# EAGLE board 3.7LiPoly Management 2.0 (EAGLE 9.2.2)
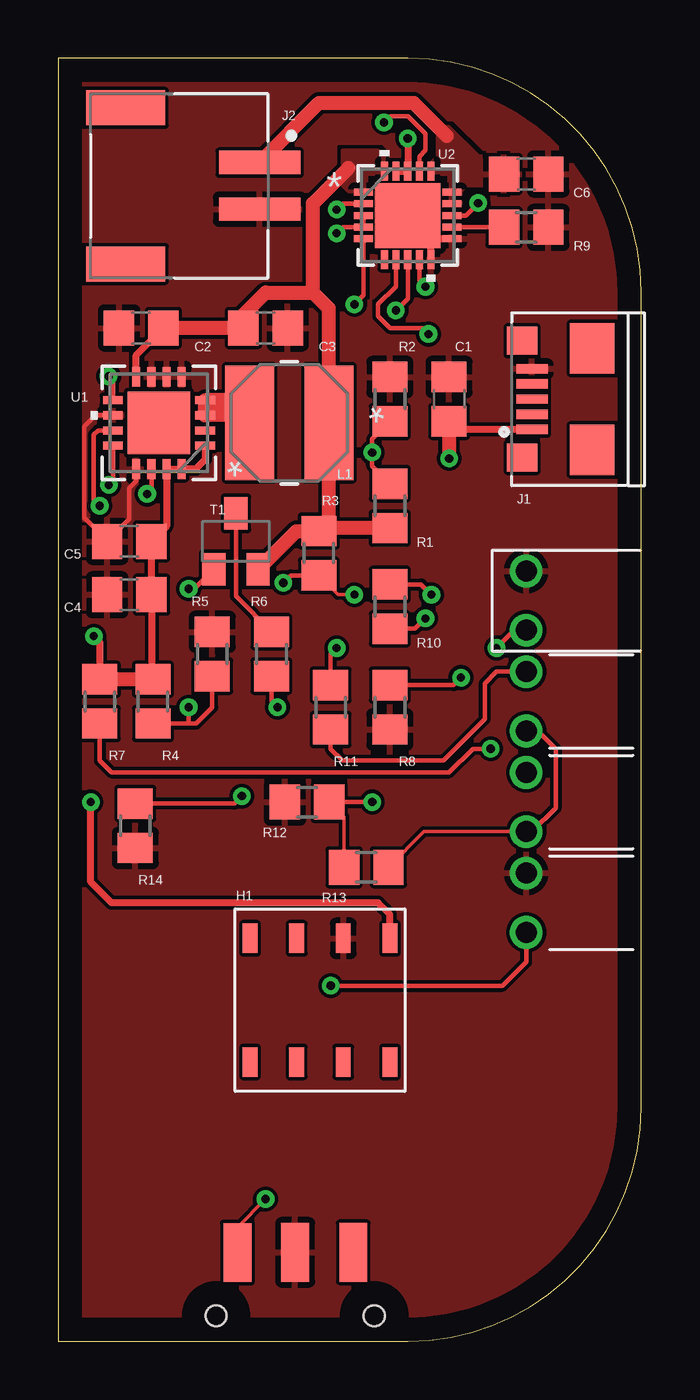
[diagram p0: board, top side]
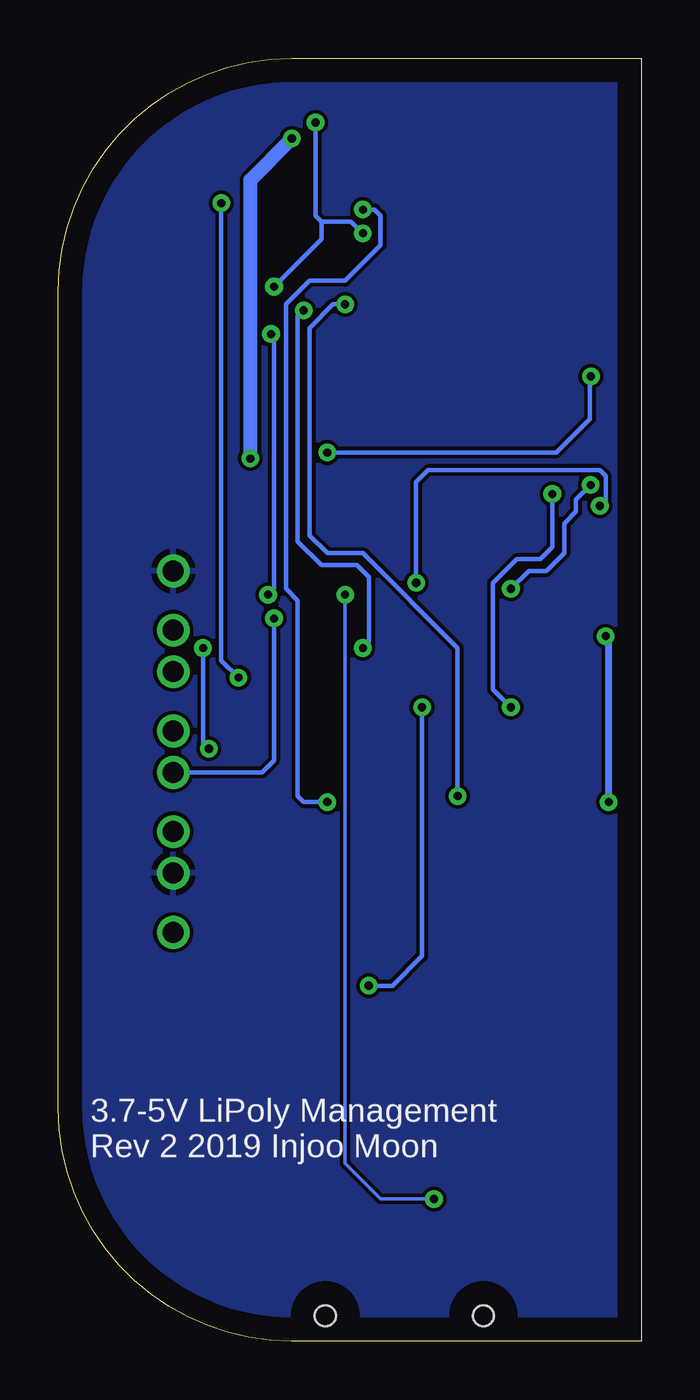
[diagram p1: board, bottom side, seen from below]

Size 25 x 55 mm. Coordinates in mm from the lower left corner, seen from the top.
Outline: 0,0 15,0 arc90 25,10 25,45 arc90 15,55 0,55 0,0
Copper layers (1*16): Top 0.035mm / dielectric 1.5mm / Bottom 0.035mm
Design rules "default": minimum track width 6mil, minimum drill 0.35mm, track to track 6mil, track to pad 6mil, pad to pad 6mil, via to via 6mil, smd to smd 6mil, copper to edge 40mil, drill to drill 6mil, minimum pad ring 10mil, minimum via ring 8mil, stop-mask expansion 4mil, vias tented up to drill 0mil, thermal gap 10mil

## Footprints (pad centres in the part's own frame; a part is rotated, then mirrored left to right if it is on the bottom)
C0805 = smd 1.3 x 1.5: 1 -0.95,0; 2 0.95,0
WP934AD = drill 0.9: ANO -1.27,0; CAT 1.27,0
M22-6340442 = smd 1.27 x 0.635: P1 -2.54,2.54; P2 -2.54,0.54; P3 -2.54,-1.46; P4 -2.54,-3.46; P5 2.76,-3.46; P6 2.76,-1.46; P7 2.76,0.54; P8 2.76,2.54
JAE_DX4R005HJ5R2000 = smd 0.4 x 1.35: 1 -1.3,0; 2 -0.65,0; 3 0,0; 4 0.65,0; 5 1.3,0 | smd 1.2 x 1.3: SH1 -2.5,0.425; SH2 2.5,0.425 | smd 2.15 x 1.9: SH3 -2.175,-2.575; SH4 2.175,-2.575
JST_S2B-PH-SM4-TB(LF)(SN) = smd 1 x 3.5: 1 -1,0; 2 1,0 | smd 1.5 x 3.4: S1 -3.35,-5.75; S2 3.35,-5.75
IND_5028 = smd 2.1 x 4.9: 1 -1.7,0; 2 1.7,0
WP934EW = drill 0.9: ANO -1.27,0; CAT 1.27,0
R0805 = smd 1.3 x 1.5: 1 -0.95,0; 2 0.95,0
SC59-BEC = smd 1 x 1.4: B -0.95,-1.2; C 0,1.2; E 0.95,-1.2
RSA16_2P7X2P7 = smd 0.85 x 0.35: 1 -1.975,0.975; 2 -1.975,0.325; 3 -1.975,-0.325; 4 -1.975,-0.975; 9 1.975,-0.975; 10 1.975,-0.325; 11 1.975,0.325; 12 1.975,0.975 | smd 0.35 x 0.85: 5 -0.975,-1.975; 6 -0.325,-1.975; 7 0.325,-1.975; 8 0.975,-1.975; 13 0.975,1.975; 14 0.325,1.975; 15 -0.325,1.975; 16 -0.975,1.975 | smd 2.692 x 2.692: 17 0,0
QFN20_4X4MC = smd 0.813 x 0.305: 1 -1.892,1; 2 -1.892,0.5; 3 -1.892,0; 4 -1.892,-0.5; 5 -1.892,-1; 11 1.892,-1; 12 1.892,-0.5; 13 1.892,0; 14 1.892,0.5; 15 1.892,1 | smd 0.305 x 0.813: 6 -1,-1.892; 7 -0.5,-1.892; 8 0,-1.892; 9 0.5,-1.892; 10 1,-1.892; 16 1,1.892; 17 0.5,1.892; 18 0,1.892; 19 -0.5,1.892; 20 -1,1.892 | smd 2.794 x 2.794: 21 0,0
JS102011SAQN = smd 1.194 x 2.515: 1 -2.477,2.527; 2 0,2.54; 3 2.489,2.54 | hole 0.9: -3.391,-0.178; 3.391,-0.178

## Placement (x,y rotation side)
C1  10uF  [C0805]  16.76,40.39 90 top
C2  10uF  [C0805]  3.56,43.43 180 top
C3  0.1uF  [C0805]  8.89,43.43 0 top
C4  2.2uF  [C0805]  3.05,32 180 top
C5  100uF  [C0805]  3.05,34.29 180 top
C6  10uF  [C0805]  20.07,50.04 0 top
CHARGE  YELLOW  [WP934AD]  20.07,27.43 90 top
DONE  GREEN  [WP934AD]  20.07,23.11 90 top
H1  M22-6340442  [M22-6340442]  11.68,14.73 270 top
J1  DX4R005HJ5R2000  [JAE_DX4R005HJ5R2000]  20.32,40.39 90 top
J2  S2B-PH-SM4-TB(LF)(SN)  [JST_S2B-PH-SM4-TB(LF)(SN)]  8.64,49.53 270 top
L1  6.8uH  [IND_5028]  9.91,39.37 180 top
LBO  RED  [WP934AD]  20.07,18.8 90 top
POWERON  BLUE  [WP934EW]  20.07,31.75 90 top
R1  1.87M  [R0805]  14.22,35.81 270 top
R2  340K  [R0805]  14.22,40.39 270 top
R3  200K  [R0805]  11.18,33.78 90 top
R4  1.87M  [R0805]  4.06,27.43 90 top
R5  200K  [R0805]  6.6,29.46 270 top
R6  1K  [R0805]  9.14,29.46 90 top
R7  1K  [R0805]  1.78,27.43 90 top
R8  1K  [R0805]  14.22,27.18 90 top
R9  100K  [R0805]  20.07,47.75 180 top
R10  1K  [R0805]  14.22,31.5 270 top
R11  1K  [R0805]  11.68,27.18 270 top
R12  100K  [R0805]  10.67,23.11 0 top
R13  270K  [R0805]  13.21,20.32 0 top
R14  15K  [R0805]  3.3,22.1 90 top
T1  MMUN2133LT1G  [SC59-BEC]  7.62,34.29 0 top
U1  TPS61090RSAR  [RSA16_2P7X2P7]  4.32,39.37 180 top
U2  MCP73871T-2CCI/ML  [QFN20_4X4MC]  14.99,48.26 0 top
U$2  JS102011SAQN  [JS102011SAQN]  10.16,1.27 0 top

## Library data of the parts
C1-C6 = rcl; SPICEPREFIX: C
CHARGE DONE LBO POWERON = KingBright
H1 = M22-6340442
J1 = DX4R005HJ5R2000; DESCRIPTION: DX4 series, receptacle, on-board, right-angle standard mount, surface mount; MF: JAE Electronics; MP: DX4R005HJ5R2000; PACKAGE: None
J2 = S2B-PH-SM4-TB_LF__SN_; DESCRIPTION: PH Series 2 Position 2 mm Pitch Surface Mount Side Entry Shrouded Header; MF: JST Sales; MP: S2B-PH-SM4-TB_LF__SN_; PACKAGE: FakePackage u
L1 = VLCF5020T-6R8N1R1
R1-R14 = rcl; SPICEPREFIX: R
T1 = transistor
U1 = TPS61090RSAR; MANUFACTURER_PART_NUMBER: TPS61090RSAR; VENDOR: Texas Instruments
U2 = MCP73871T-2CCI; MANUFACTURER_PART_NUMBER: MCP73871T2CCIML; VENDOR: Microchip
U$2 = JS102011SAQN

## Nets
+3V3: CHARGE.ANO DONE.ANO R13.2
CTRL: U2.3 U2.4 U2.9 U2.17
FB: R4.1 R5.2 U1.14
GND: C1.2 C2.2 C3.2 C4.2 C5.2 C6.2 H1.P2 J1.5 J2.2 LBO.CAT POWERON.CAT R2.1 R5.1 R8.1 R9.1 R12.1 R14.1 U1.5 U1.6 U1.7 U1.10 U1.13 U2.10 U2.11 U2.21 U$2.2
LBO: T1.B U1.12
N$1: R1.1 R2.2 U1.9
N$2: R3.1 U1.11 U$2.1
N$3: CHARGE.CAT R11.2
N$4: R8.2 U2.13
N$5: R6.2 T1.C
N$6: LBO.ANO R6.1
N$7: POWERON.ANO R7.1
N$8: R9.2 U2.12
N$9: DONE.CAT R10.2
N$11: R11.1 U2.8
N$12: R10.1 U2.7
N$13: R14.2 U2.5
N$14: R12.2 R13.1 U2.2
SW: L1.2 U1.3 U1.4
VBAT [VBAT]: C2.1 C3.1 L1.1 R1.2 R3.2 T1.E U1.8 U2.1 U2.20
VBUS: C1.1 J1.1 U2.18 U2.19
VLIPO: C6.1 J2.1 U2.14 U2.15 U2.16
VOUT: C4.1 C5.1 H1.P1 R4.2 R7.2 U1.1 U1.15 U1.16

## Tracks (layer width: path | path; a pad name or v marks a point on that pad's centre or on a via)
+3V3
  Top 0.152: R13.2 15.68,21.84 DONE.ANO
  Top 0.203: DONE.ANO 20.32,21.84 21.34,22.86 21.34,25.4 20.57,26.16 CHARGE.ANO
CTRL  (via drill 0.35)
  Top 0.203: U2.3 U2.4 12.2,47.76 v11.94,47.5 | U2.17 15.49,50.79 15.75,51.05 15.75,51.77 14.99,52.53 14.25,52.53 v13.97,52.25 | U2.9 15.49,45.47 v15.75,45.21
  Bottom 0.203: v13.97,52.25 13.97,48.26 13.72,48.01 | 13.72,48.01 12.45,48.01 v11.94,47.5 | v15.75,45.21 13.72,47.24 13.72,48.01
FB  (via drill 0.35)
  Top 0.203: R4.1 5.59,26.48 | 5.59,26.48 5.91,26.48 6.6,27.18 R5.2 | U1.14 3.99,36.51 v3.81,36.32 | v5.59,27.18 5.59,26.48
  Bottom 0.203: v3.81,36.32 3.81,34.04 4.32,33.53 5.33,33.53 6.35,32.51 6.35,27.94 v5.59,27.18
GND
  Top 0.203: U1.13 3.34,36.87 3.05,36.58 3.05,35.24 C5.2 2.1,34.33 1.12,35.31 1.12,39.22 1.59,39.7 U1.10
  Top 0.305: U2.10 15.99,47.23 16.02,47.26 U2.11
  Top 0.61: 15.99,47.23 15.99,47.26 U2.21
  pour Bottom (rank 6): -1.78,56.9 28.45,56.9 28.45,-3.05 -1.78,-3.05
  pour Top (rank 6): -2.29,57.4 28.96,57.4 28.96,-3.56 -2.29,-3.56
  pour Top: 3.81,41.4 3.81,40.89 3.56,40.64 3.56,40.39 5.59,40.39 5.59,41.66 3.81,41.66
LBO  (via drill 0.35)
  Top 0.203: v5.59,32.26 5.84,32.26 T1.B | U1.12 2.34,36.89 v2.17,36.71
  Bottom 0.203: v5.59,32.26 4.83,33.02 4.06,33.02 3.3,33.78 3.3,35.05 2.79,35.56 2.79,36.08 v2.17,36.71
N$1  (via drill 0.35)
  Top 0.203: U1.9 2.34,41.18 v2.16,41.37 | R2.2 13.46,38.67 v13.46,38.1 13.46,37.53 R1.1
  Bottom 0.203: v2.16,41.37 2.2,41.32 2.2,39.54 3.65,38.1 v13.46,38.1
N$2  (via drill 0.35)
  Top 0.152: R3.1 12,32 v12.7,32 | v8.89,6.1 7.68,4.89 U$2.1
  Top 0.203: v9.65,32.51 9.97,32.83 R3.1 | U1.11 1.71,39.05 1.52,38.86 1.52,36.07 v1.78,35.81
  Bottom 0.152: v12.7,32 12.7,7.62 11.18,6.1 v8.89,6.1
  Bottom 0.203: v9.65,32.51 9.65,36.83 9.14,37.34 2.43,37.34 1.78,37.34 1.52,37.08 1.52,36.07 v1.78,35.81
N$3
  Top 0.203: R11.2 11.68,25.4 12.19,24.89 16.51,24.89 18.29,26.67 18.29,28.19 18.8,28.7 CHARGE.CAT
N$4  (via drill 0.35)
  Top 0.203: U2.13 17.47,48.26 v18.01,48.79 | v17.27,28.45 16.95,28.13 R8.2
  Bottom 0.203: v18.01,48.79 18.01,29.18 v17.27,28.45
N$5
  Top 0.203: R6.2 7.62,31.94 T1.C
N$6  (via drill 0.35)
  Top 0.203: R6.1 9.14,27.43 v9.4,27.18 | v11.68,15.24 19.05,15.24 20.07,16.26 LBO.ANO
  Bottom 0.203: v9.4,27.18 9.4,16.51 10.67,15.24 v11.68,15.24
N$7  (via drill 0.35)
  Top 0.203: POWERON.ANO 19.56,30.48 v18.8,29.72 | v18.54,25.4 17.78,25.4 16.76,24.38 2.29,24.38 1.78,24.89 R7.1
  Bottom 0.203: v18.8,29.72 18.8,25.65 v18.54,25.4
N$8
  Top 0.203: U2.12 19.11,47.76 R9.2
N$9  (via drill 0.35)
  Top 0.203: R10.2 15.31,30.55 v15.75,30.99
  Bottom 0.203: v15.75,30.99 15.75,24.89 16.26,24.38 DONE.CAT
N$11  (via drill 0.35)
  Top 0.203: U2.8 14.99,44.7 v14.48,44.2 | v11.94,29.72 11.68,29.46 R11.1
  Bottom 0.203: v14.48,44.2 14.73,43.94 14.73,34.29 13.72,33.27 12.19,33.27 11.68,32.77 11.68,29.97 v11.94,29.72
N$12  (via drill 0.35)
  Top 0.203: U2.7 14.49,45.22 13.72,44.45 13.72,43.94 14.22,43.43 15.62,43.43 v15.87,43.18 | R10.1 15.56,32.45 v16,32
  Bottom 0.203: v16,32 15.75,32.26 15.75,43.06 v15.87,43.18
N$13  (via drill 0.35)
  Top 0.203: U2.5 13.09,44.84 v12.7,44.45 | v7.87,23.37 7.55,23.05 R14.2
  Bottom 0.203: v12.7,44.45 13.21,44.45 14.22,43.43 14.22,34.54 13.46,33.78 11.94,33.78 7.87,29.72 v7.87,23.37
N$14  (via drill 0.35)
  Top 0.152: R13.1 12.26,22.47 R12.2
  Top 0.203: U2.2 12.18,48.76 v11.94,48.51 | R12.2 v13.46,23.11
  Bottom 0.203: v11.94,48.51 11.43,48.51 11.18,48.26 11.18,46.99 12.7,45.47 14.22,45.47 15.24,44.45 15.24,32.26 14.73,31.75 14.73,23.37 14.48,23.11 v13.46,23.11
SW
  Top 0.61: 7.41,40.17 L1.2 7.88,39.7 U1.3 6.29,39.88 | 7.41,40.17 7.23,40.34 U1.4 6.29,39.88 | 6.29,39.88 7.11,39.88 7.41,40.17
VBAT
  Top 0.305: U1.8 3.34,42.27 C2.1
  Top 0.61: C3.1 7.94,43.75 | C3.1 C2.1 4.51,43.11 | T1.E 10.21,34.73 R3.2 | R3.2 11.61,35.16 L1.1 11.61,44.27 10.92,44.96 | R1.2 11.31,34.86 R3.2 | C3.1 7.94,44.01 8.89,44.96 10.92,44.96 | 10.92,44.96 10.92,48.77 12.45,50.29
  pour Top: 13.21,49.28 12.45,49.28 12.19,49.53 12.19,50.8 12.19,51.05 13.72,51.05 13.97,50.8 13.97,50.04 13.21,50.04
VBUS  (via drill 0.35)
  Top 0.305: J1.1 17.11,39.09 C1.1 | v14.99,51.56 U2.18 U2.19
  Top 0.61: v16.76,37.85 C1.1 17.12,39.08
  Bottom 0.61: v16.76,37.85 16.76,49.78 v14.99,51.56
VLIPO
  Top 0.61: J2.1 11.19,53.09 15.24,53.09 16.65,51.68
  pour Top: 16.76,48.77 17.27,48.77 17.27,49.28 17.53,49.53 18.29,49.53 18.54,49.28 18.8,49.28 19.81,49.28 19.81,50.8 18.54,50.8 18.03,50.8 16.76,52.07 16.51,52.07 16.26,51.82 16.26,51.56 16.26,50.8 16,50.55 16,50.04 16.76,50.04
VOUT  (via drill 0.35)
  Top 0.305: R4.2 4,28.45 C4.1 C5.1 4.64,34.94 U1.15 U1.16 5.9,37.4 6.29,37.79 U1.1 | v1.52,30.23 1.78,29.97 R7.2 | H1.P1 14.22,18.29 13.72,18.8 2.29,18.8 1.39,19.69 v1.39,23.11
  Top 0.61: R7.2 R4.2
  Bottom 0.305: v1.39,23.11 1.39,30.1 v1.52,30.23

## Text on the board
bNames: 3.7-5V LiPoly Management / Rev 2 2019 Injoo Moon